# EAGLE board board_bkp (EAGLE 7.2.0)
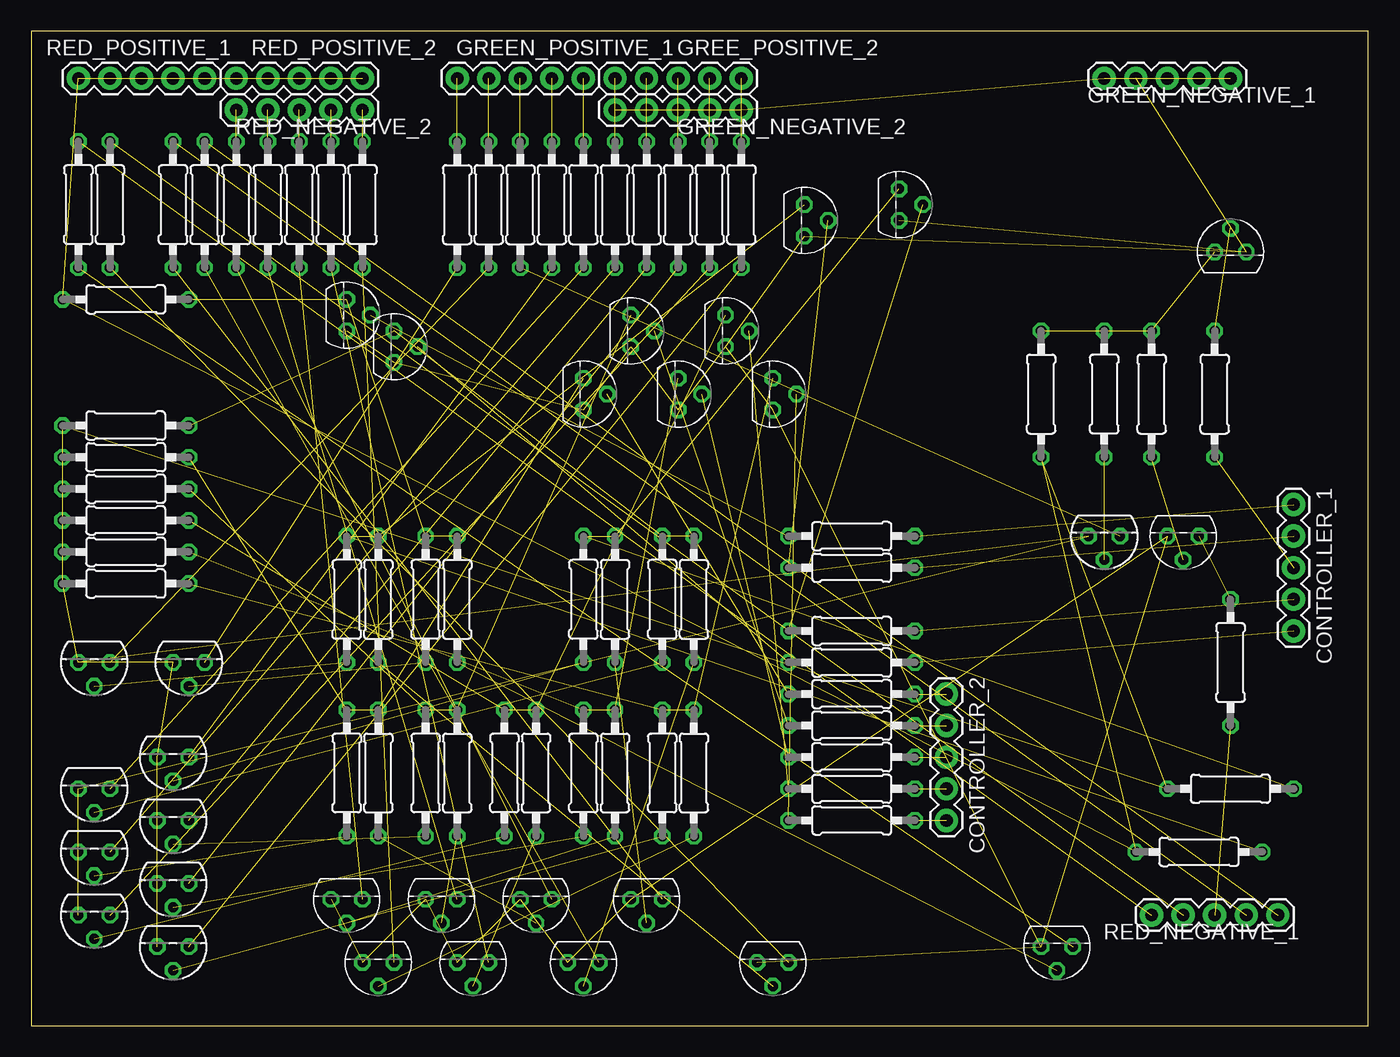
[diagram p0: board, top side]
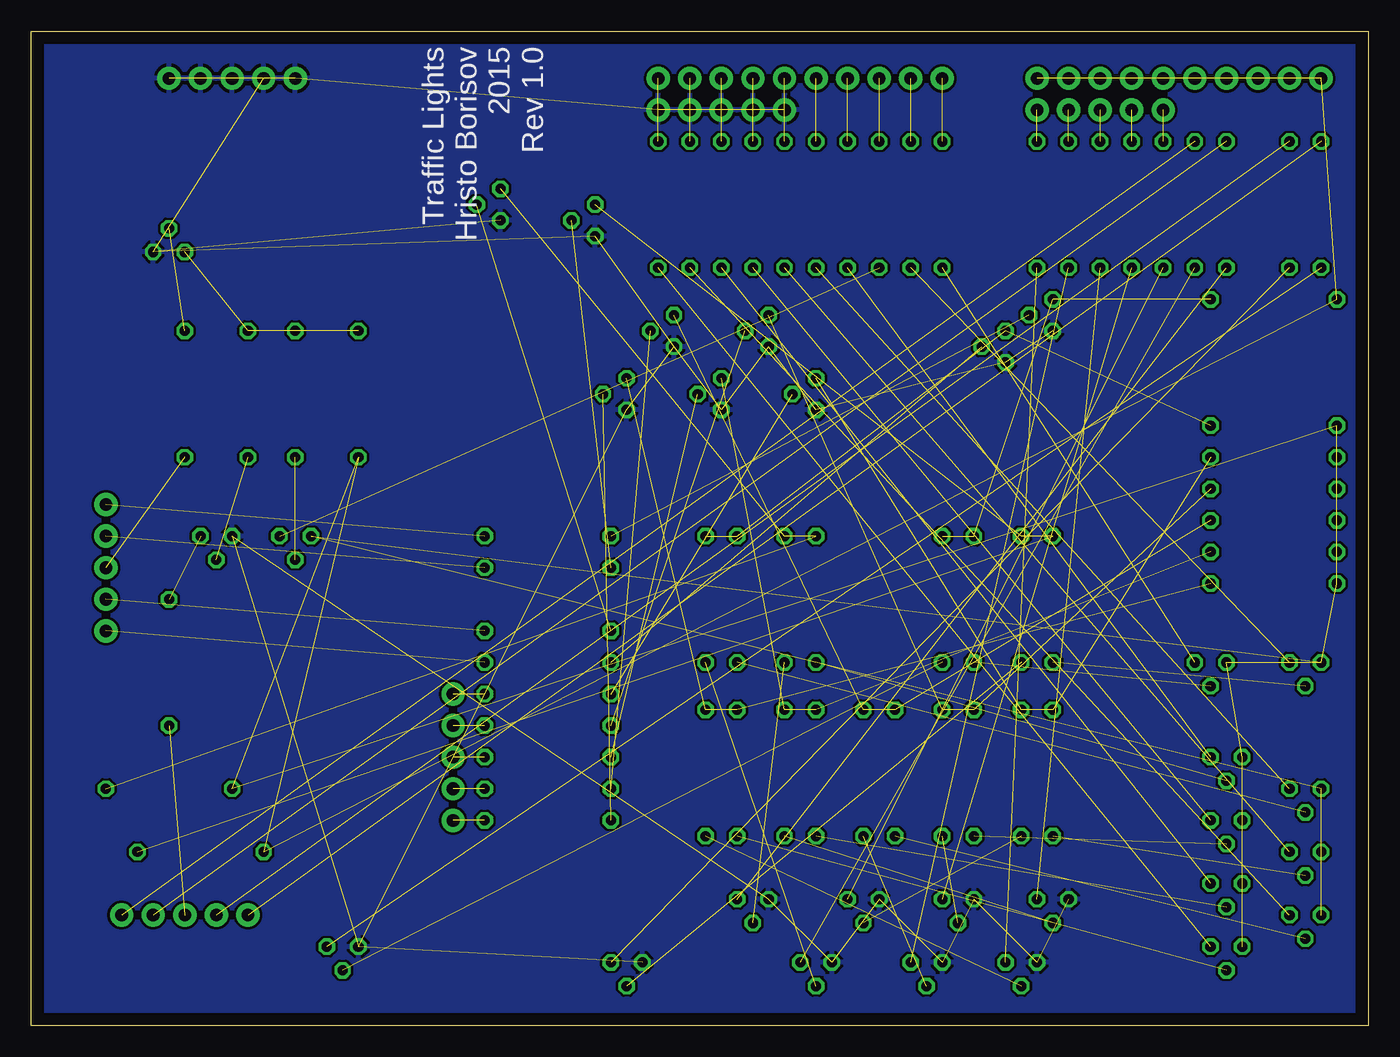
[diagram p1: board, bottom side, seen from below]

Size 107.62 x 80 mm. Coordinates in mm from the lower left corner, seen from the top.
Outline: 0,0 107.62,0 107.62,80 0,80 0,0
Copper layers (1*16): Top 0.035mm / dielectric 1.5mm / Bottom 0.035mm
Design rules "default": minimum track width 10mil, minimum drill 24mil, track to track 8mil, track to pad 8mil, pad to pad 8mil, via to via 8mil, smd to smd 8mil, copper to edge 40mil, drill to drill 8mil, minimum pad ring 10mil, minimum via ring 8mil, stop-mask expansion 4mil, vias tented up to drill 0mil, thermal gap 10mil
Net classes: 0 default: width 0.203 mm

## Footprints (pad centres in the part's own frame; a part is rotated, then mirrored left to right if it is on the bottom)
1X05 = drill 1.016 pad 1.88: 1 0,0; 2 2.54,0; 3 5.08,0; 4 7.62,0; 5 10.16,0
TO92 = drill 0.813 octagon: 1 1.27,0; 2 0,1.905; 3 -1.27,0
0207/10 = drill 0.813 octagon: 1 -5.08,0; 2 5.08,0

## Placement (x,y rotation side)
CONTROLLER_1  [1X05]  101.6,41.91 270 top
CONTROLLER_2  [1X05]  73.66,26.67 270 top
GREE_POSITIVE_2  [1X05]  46.99,76.2 0 top
GREEN_NEGATIVE_1  [1X05]  86.36,76.2 0 top
GREEN_NEGATIVE_2  [1X05]  46.99,73.66 0 top
GREEN_POSITIVE_1  [1X05]  34.29,76.2 0 top
Q1  BC557  [TO92]  12.7,29.21 180 top
Q2  BC557  [TO92]  5.08,29.21 180 top
Q3  BC557  [TO92]  86.36,39.37 180 top
Q4  BC557  [TO92]  11.43,21.59 180 top
Q5  BC557  [TO92]  5.08,19.05 180 top
Q6  BC557  [TO92]  11.43,16.51 180 top
Q7  BC557  [TO92]  11.43,11.43 180 top
Q8  BC557  [TO92]  5.08,8.89 180 top
Q9  BC557  [TO92]  11.43,6.35 180 top
Q10  BC557  [TO92]  5.08,13.97 180 top
R1  10k  [0207/10]  25.4,34.29 90 top
R2  10k  [0207/10]  31.75,34.29 90 top
R3  23k  [0207/10]  34.29,34.29 270 top
R4  23k  [0207/10]  27.94,34.29 270 top
R5  10k  [0207/10]  66.04,36.83 0 top
R6  1k  [0207/10]  93.98,13.97 180 top
R7  330  [0207/10]  6.35,66.04 90 top
R8  10k  [0207/10]  66.04,39.37 0 top
R9  1k  [0207/10]  7.62,58.42 180 top
R10  330  [0207/10]  3.81,66.04 90 top
R11  330  [0207/10]  34.29,66.04 270 top
R12  330  [0207/10]  36.83,66.04 270 top
R13  10k  [0207/10]  86.36,50.8 90 top
R14  23k  [0207/10]  90.17,50.8 270 top
R15  10k  [0207/10]  95.25,50.8 270 top
R16  1k  [0207/10]  81.28,50.8 270 top
R17  330  [0207/10]  96.52,29.21 270 top
R18  330  [0207/10]  39.37,66.04 270 top
R19  10k  [0207/10]  44.45,34.29 90 top
R20  23k  [0207/10]  46.99,34.29 270 top
R21  10k  [0207/10]  66.04,31.75 0 top
R22  1k  [0207/10]  96.52,19.05 180 top
R23  330  [0207/10]  11.43,66.04 90 top
R24  330  [0207/10]  41.91,66.04 270 top
R25  10k  [0207/10]  50.8,34.29 90 top
R26  23k  [0207/10]  53.34,34.29 270 top
R27  10k  [0207/10]  66.04,29.21 0 top
R28  1k  [0207/10]  7.62,48.26 180 top
R29  330  [0207/10]  13.97,66.04 90 top
R30  330  [0207/10]  44.45,66.04 270 top
R31  10k  [0207/10]  31.75,20.32 90 top
R32  23k  [0207/10]  34.29,20.32 270 top
R33  10k  [0207/10]  66.04,24.13 0 top
R34  1k  [0207/10]  7.62,43.18 180 top
R35  330  [0207/10]  19.05,66.04 90 top
R36  330  [0207/10]  49.53,66.04 270 top
R37  10k  [0207/10]  44.45,20.32 90 top
R38  23k  [0207/10]  46.99,20.32 270 top
R39  10k  [0207/10]  66.04,21.59 0 top
R40  1k  [0207/10]  7.62,38.1 180 top
R41  330  [0207/10]  21.59,66.04 90 top
R42  330  [0207/10]  52.07,66.04 270 top
R43  10k  [0207/10]  38.1,20.32 90 top
R44  23k  [0207/10]  40.64,20.32 270 top
R45  10k  [0207/10]  66.04,19.05 0 top
R46  1k  [0207/10]  7.62,40.64 180 top
R47  330  [0207/10]  24.13,66.04 90 top
R48  330  [0207/10]  54.61,66.04 270 top
R49  10k  [0207/10]  50.8,20.32 90 top
R50  23k  [0207/10]  53.34,20.32 270 top
R51  10k  [0207/10]  66.04,16.51 0 top
R52  1k  [0207/10]  7.62,35.56 180 top
R53  330  [0207/10]  26.67,66.04 90 top
R54  330  [0207/10]  57.15,66.04 270 top
R55  10k  [0207/10]  25.4,20.32 90 top
R56  23k  [0207/10]  27.94,20.32 270 top
R57  10k  [0207/10]  66.04,26.67 0 top
R58  1k  [0207/10]  7.62,45.72 180 top
R59  330  [0207/10]  16.51,66.04 90 top
R60  330  [0207/10]  46.99,66.04 270 top
RED_NEGATIVE_1  [1X05]  90.17,8.89 0 top
RED_NEGATIVE_2  [1X05]  16.51,73.66 0 top
RED_POSITIVE_1  [1X05]  3.81,76.2 0 top
RED_POSITIVE_2  [1X05]  16.51,76.2 0 top
T1  BC547  [TO92]  82.55,6.35 180 top
T2  BC547  [TO92]  25.4,57.15 270 top
T3  BC547  [TO92]  59.69,5.08 180 top
T4  BC547  [TO92]  62.23,64.77 270 top
T5  BC547  [TO92]  92.71,39.37 180 top
T6  BC547  [TO92]  96.52,62.23 0 top
T7  BC547  [TO92]  49.53,10.16 180 top
T8  BC547  [TO92]  69.85,66.04 270 top
T9  BC547  [TO92]  44.45,5.08 180 top
T10  BC547  [TO92]  29.21,54.61 270 top
T11  BC547  [TO92]  33.02,10.16 180 top
T12  BC547  [TO92]  48.26,55.88 270 top
T13  BC547  [TO92]  25.4,10.16 180 top
T14  BC547  [TO92]  52.07,50.8 270 top
T15  BC547  [TO92]  35.56,5.08 180 top
T16  BC547  [TO92]  55.88,55.88 270 top
T17  BC547  [TO92]  27.94,5.08 180 top
T18  BC547  [TO92]  59.69,50.8 270 top
T19  BC547  [TO92]  40.64,10.16 180 top
T20  BC547  [TO92]  44.45,50.8 270 top

## Library data of the parts
CONTROLLER_1 CONTROLLER_2 GREE_POSITIVE_2 GREEN_NEGATIVE_1 GREEN_NEGATIVE_2 GREEN_POSITIVE_1 RED_NEGATIVE_1 RED_NEGATIVE_2 RED_POSITIVE_1 RED_POSITIVE_2 = SparkFun-Connectors
Q1-Q10 = transistor-pnp
R1-R60 = resistor
T1-T20 = transistor

## Nets
GND: GREEN_NEGATIVE_1.1 GREEN_NEGATIVE_1.2 GREEN_NEGATIVE_1.3 GREEN_NEGATIVE_1.4 GREEN_NEGATIVE_1.5 GREEN_NEGATIVE_2.1 GREEN_NEGATIVE_2.2 GREEN_NEGATIVE_2.3 GREEN_NEGATIVE_2.4 GREEN_NEGATIVE_2.5 T1.1 T2.1 T3.1 T4.1 T5.1 T6.1 T7.1 T8.1 T9.1 T10.1 T11.1 T12.1 T13.1 T14.1 T15.1 T16.1 T17.1 T18.1 T19.1 T20.1
N$1: GREEN_POSITIVE_1.1 R11.1
N$2: R5.1 T4.2
N$3: Q2.2 R1.1
N$4: R2.2 R3.1 R9.1 T2.3
N$5: R8.1 T2.2
N$6: Q1.2 R2.1
N$7: Q1.3 R11.2
N$8: Q2.3 R12.2
N$9: R17.2 RED_NEGATIVE_1.3
N$10: R10.1 T1.3
N$11: R3.2 T1.2
N$12: CONTROLLER_1.1 R8.2
N$13: R7.2 RED_NEGATIVE_1.2
N$14: R7.1 T3.3
N$15: R4.2 T3.2
N$16: CONTROLLER_1.2 R5.2
N$17: R1.2 R4.1 R6.1 T4.3
N$18: CONTROLLER_1.3 R15.2
N$19: R15.1 T6.2
N$20: Q3.2 R13.1
N$21: Q3.3 R18.2
N$22: R23.2 RED_NEGATIVE_1.4
N$23: R17.1 T5.3
N$24: R14.2 T5.2
N$25: CONTROLLER_1.4 R21.2
N$26: R13.2 R14.1 R16.1 T6.3
N$27: GREEN_POSITIVE_1.2 R12.1
N$28: R21.1 T8.2
N$29: Q4.2 R19.1
N$30: Q4.3 R24.2
N$31: R29.2 RED_NEGATIVE_1.5
N$32: R23.1 T7.3
N$33: R20.2 T7.2
N$34: CONTROLLER_1.5 R27.2
N$35: R19.2 R20.1 R22.1 T8.3
N$36: GREEN_POSITIVE_1.4 R24.1
N$37: R27.1 T10.2
N$38: Q5.2 R25.1
N$39: Q5.3 R30.2
N$40: GREEN_POSITIVE_1.3 R18.1
N$41: R29.1 T9.3
N$42: R26.2 T9.2
N$43: R10.2 RED_NEGATIVE_1.1
N$44: R25.2 R26.1 R28.1 T10.3
N$45: GREEN_POSITIVE_1.5 R30.1
N$46: R33.1 T12.2
N$47: Q6.2 R31.1
N$48: Q6.3 R36.2
N$49: R35.2 RED_NEGATIVE_2.2
N$50: R35.1 T11.3
N$51: R32.2 T11.2
N$52: CONTROLLER_2.1 R57.2
N$53: R31.2 R32.1 R34.1 T12.3
N$54: R41.2 RED_NEGATIVE_2.3
N$55: R39.1 T14.2
N$56: Q7.2 R37.1
N$57: Q7.3 R42.2
N$58: R47.2 RED_NEGATIVE_2.4
N$59: R41.1 T13.3
N$60: R38.2 T13.2
N$61: CONTROLLER_2.2 R33.2
N$62: R37.2 R38.1 R40.1 T14.3
N$63: R53.2 RED_NEGATIVE_2.5
N$64: R45.1 T16.2
N$65: Q8.2 R43.1
N$66: Q8.3 R48.2
N$67: GREE_POSITIVE_2.1 R60.1
N$68: R47.1 T15.3
N$69: R44.2 T15.2
N$70: CONTROLLER_2.3 R39.2
N$71: R43.2 R44.1 R46.1 T16.3
N$72: GREE_POSITIVE_2.2 R36.1
N$73: R51.1 T18.2
N$74: Q9.2 R49.1
N$75: Q9.3 R54.2
N$76: GREE_POSITIVE_2.3 R42.1
N$77: R53.1 T17.3
N$78: R50.2 T17.2
N$79: CONTROLLER_2.4 R45.2
N$80: R49.2 R50.1 R52.1 T18.3
N$81: GREE_POSITIVE_2.4 R48.1
N$82: R57.1 T20.2
N$83: Q10.2 R55.1
N$84: Q10.3 R60.2
N$85: R59.2 RED_NEGATIVE_2.1
N$86: R59.1 T19.3
N$87: R56.2 T19.2
N$88: GREE_POSITIVE_2.5 R54.1
N$89: R55.2 R56.1 R58.1 T20.3
N$90: CONTROLLER_2.5 R51.2
VCC: Q1.1 Q2.1 Q3.1 Q4.1 Q5.1 Q6.1 Q7.1 Q8.1 Q9.1 Q10.1 R6.2 R9.2 R16.2 R22.2 R28.2 R34.2 R40.2 R46.2 R52.2 R58.2 RED_POSITIVE_1.1 RED_POSITIVE_1.2 RED_POSITIVE_1.3 RED_POSITIVE_1.4 RED_POSITIVE_1.5 RED_POSITIVE_2.1 RED_POSITIVE_2.2 RED_POSITIVE_2.3 RED_POSITIVE_2.4 RED_POSITIVE_2.5

## Tracks (layer width: path | path; a pad name or v marks a point on that pad's centre or on a via)
GND  (29 unrouted)
  pour Bottom: -2.54,81.28 110.49,81.28 110.49,-2.54 -2.54,-2.54
N$1  (1 unrouted)
N$2  (1 unrouted)
N$3  (1 unrouted)
N$4  (3 unrouted)
N$5  (1 unrouted)
N$6  (1 unrouted)
N$7  (1 unrouted)
N$8  (1 unrouted)
N$9  (1 unrouted)
N$10  (1 unrouted)
N$11  (1 unrouted)
N$12  (1 unrouted)
N$13  (1 unrouted)
N$14  (1 unrouted)
N$15  (1 unrouted)
N$16  (1 unrouted)
N$17  (3 unrouted)
N$18  (1 unrouted)
N$19  (1 unrouted)
N$20  (1 unrouted)
N$21  (1 unrouted)
N$22  (1 unrouted)
N$23  (1 unrouted)
N$24  (1 unrouted)
N$25  (1 unrouted)
N$26  (3 unrouted)
N$27  (1 unrouted)
N$28  (1 unrouted)
N$29  (1 unrouted)
N$30  (1 unrouted)
N$31  (1 unrouted)
N$32  (1 unrouted)
N$33  (1 unrouted)
N$34  (1 unrouted)
N$35  (3 unrouted)
N$36  (1 unrouted)
N$37  (1 unrouted)
N$38  (1 unrouted)
N$39  (1 unrouted)
N$40  (1 unrouted)
N$41  (1 unrouted)
N$42  (1 unrouted)
N$43  (1 unrouted)
N$44  (3 unrouted)
N$45  (1 unrouted)
N$46  (1 unrouted)
N$47  (1 unrouted)
N$48  (1 unrouted)
N$49  (1 unrouted)
N$50  (1 unrouted)
N$51  (1 unrouted)
N$52  (1 unrouted)
N$53  (3 unrouted)
N$54  (1 unrouted)
N$55  (1 unrouted)
N$56  (1 unrouted)
N$57  (1 unrouted)
N$58  (1 unrouted)
N$59  (1 unrouted)
N$60  (1 unrouted)
N$61  (1 unrouted)
N$62  (3 unrouted)
N$63  (1 unrouted)
N$64  (1 unrouted)
N$65  (1 unrouted)
N$66  (1 unrouted)
N$67  (1 unrouted)
N$68  (1 unrouted)
N$69  (1 unrouted)
N$70  (1 unrouted)
N$71  (3 unrouted)
N$72  (1 unrouted)
N$73  (1 unrouted)
N$74  (1 unrouted)
N$75  (1 unrouted)
N$76  (1 unrouted)
N$77  (1 unrouted)
N$78  (1 unrouted)
N$79  (1 unrouted)
N$80  (3 unrouted)
N$81  (1 unrouted)
N$82  (1 unrouted)
N$83  (1 unrouted)
N$84  (1 unrouted)
N$85  (1 unrouted)
N$86  (1 unrouted)
N$87  (1 unrouted)
N$88  (1 unrouted)
N$89  (3 unrouted)
N$90  (1 unrouted)
VCC  (29 unrouted)

## Text on the board
bNames: Traffic Lights / Hristo Borisov / 2015 / Rev 1.0